# Altium PCB PUMP_MODULE_20230110.PcbDoc (part 2 of 6)
Units mm, origin at the board's own origin, x right, y up, seen from the top; angles counter-clockwise.
Board outline 260.15 x 142.01 mm, 4 copper layers (Top Layer, Mid-Layer 1, Mid-Layer 2, Bottom Layer); 422 components, 240 nets, 1746 pads, 416 vias.
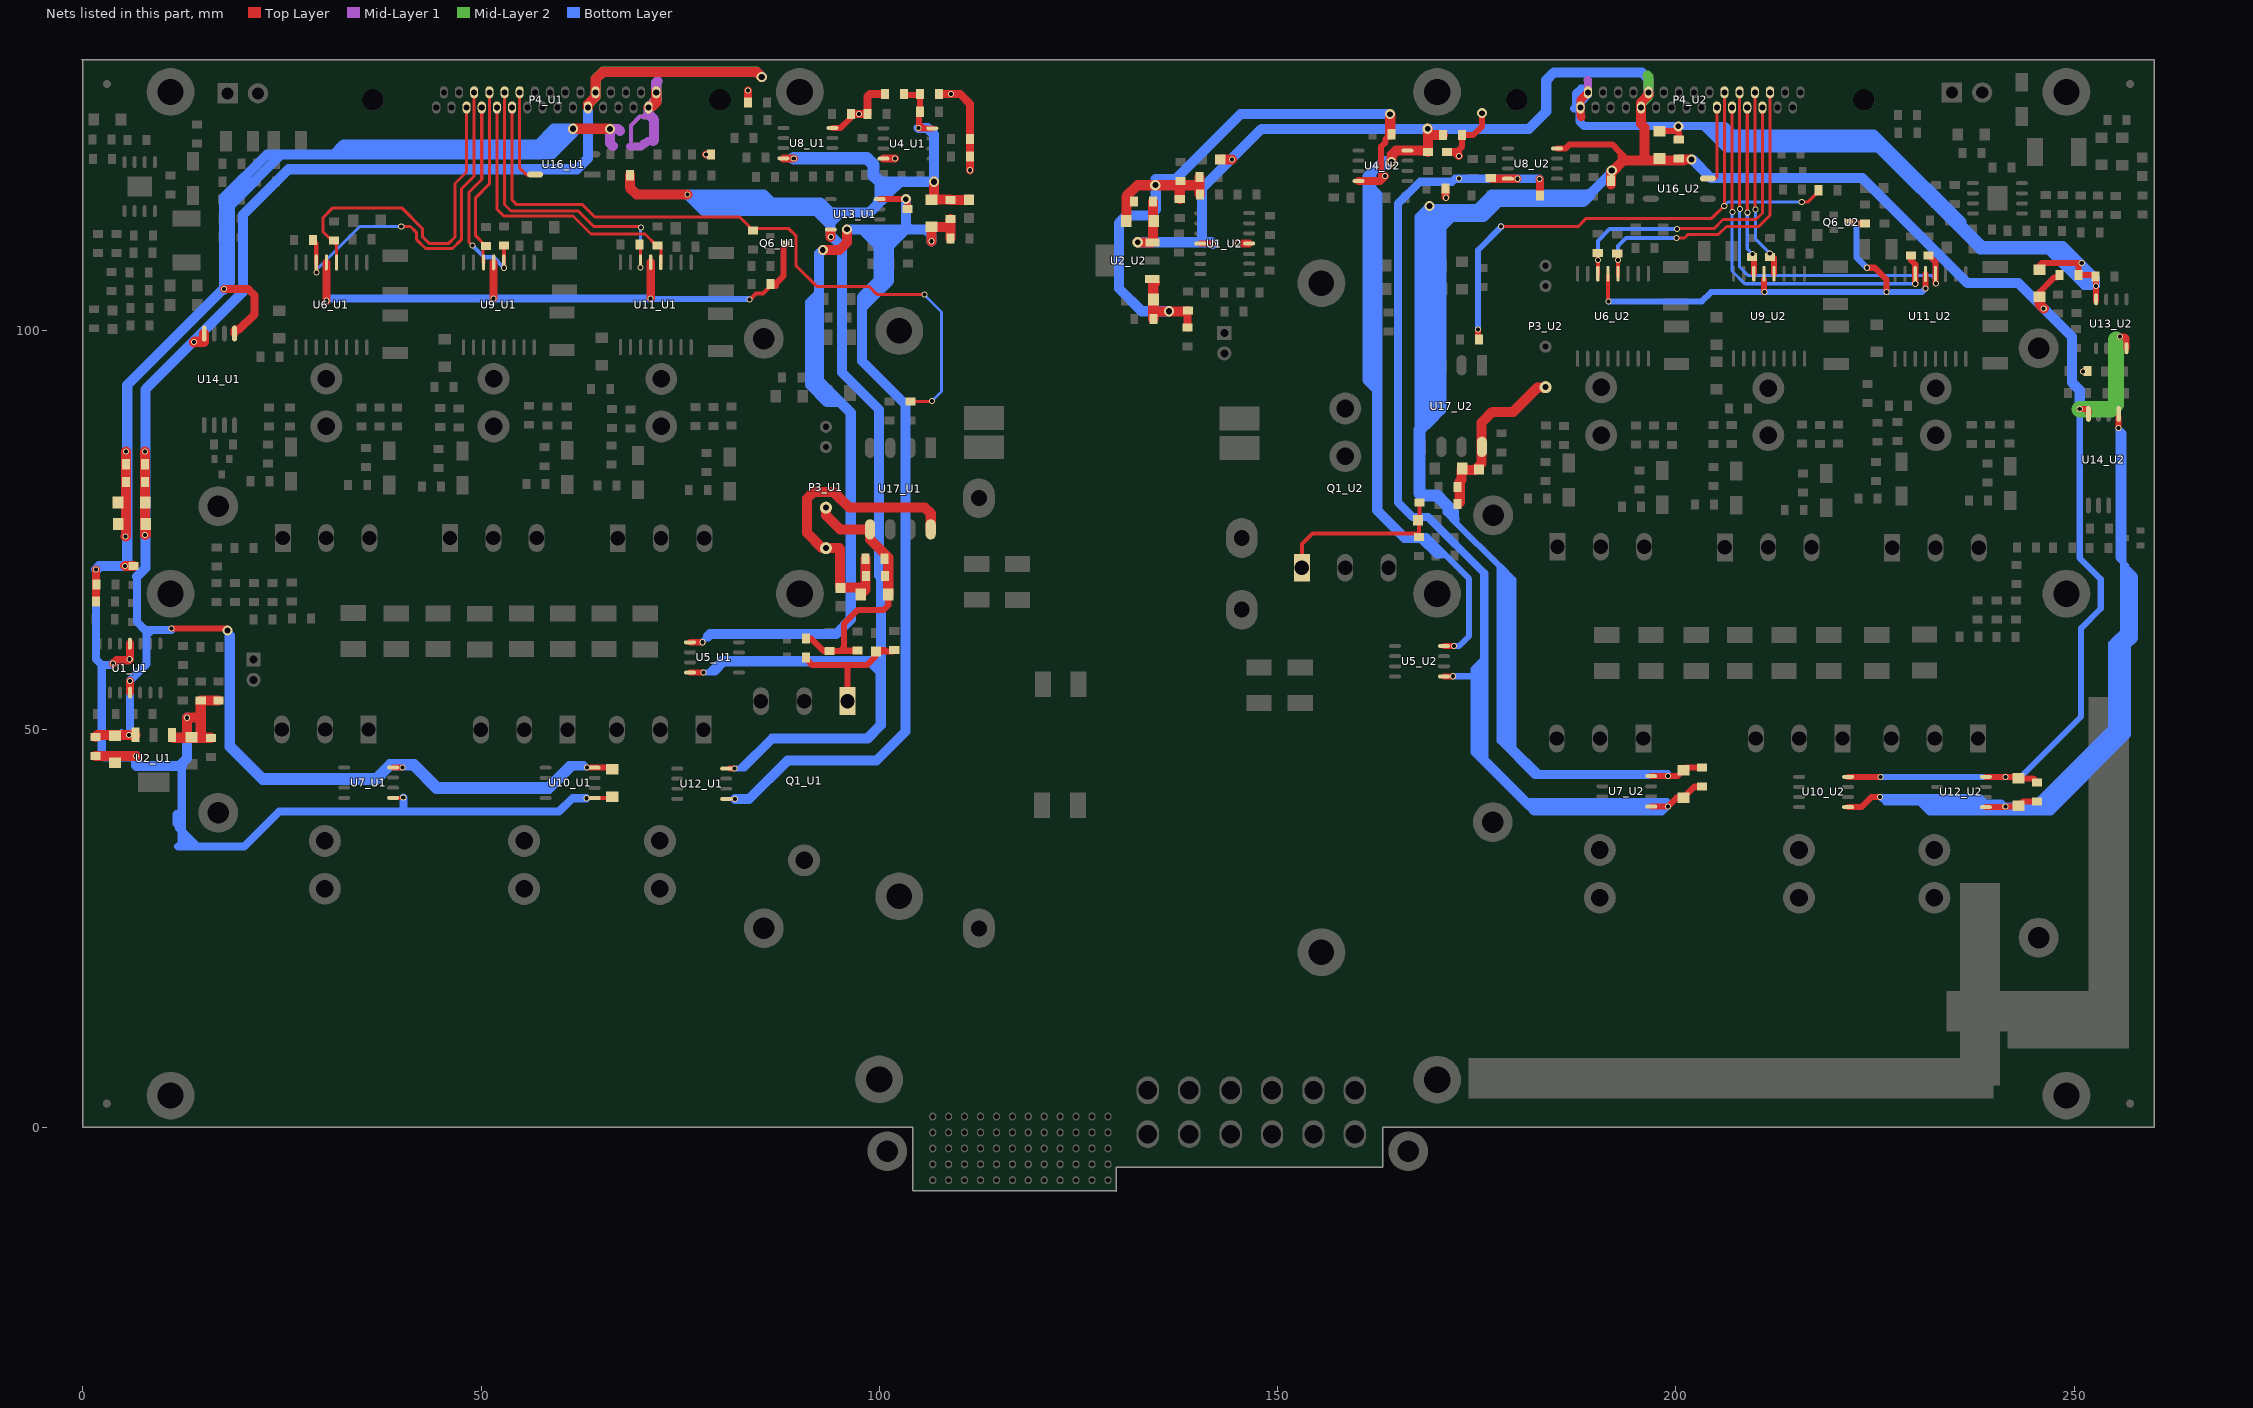
[diagram p4: the nets of this part, all layers, seen from the top]

## Free pads (board coordinates)
  rect 2.54x2.54 on Top Solder: 0(30.302,69.52) 0(51.587,69.596) 0(72.466,69.723) ""(161.417,9.855)
  rect 4.572x5.08 on Bottom Solder: 1(153.619,63.475) 1(190.221,54.534) 11(30.734,60.63) 11(30.759,55.448)
  rect 5.08x10.16 on Bottom Solder: 1(191.745,60.528) 1(195.301,64.186) 6(204.14,24.384) 6(204.14,33.35) 6(204.14,43.104) 7(243.713,85.573) 7(243.713,87.63)
  rect 5.08x8.89 on Bottom Solder: 1(224.714,58.268) 1(224.714,63.627) 1(234.315,58.42) 1(234.315,61.316) 1(236.957,63.957)
  rect 5.08x11.43 on Bottom Solder: 2(203.733,60.604) 2(204.14,53.467) 2(204.14,60.604) 2(213.411,60.274) 2(216.306,63.602)
  rect 5.08x3.81 on Bottom Solder: 3(232.664,54.077) 12(83.642,36.754) 12(91.999,40.869) 12(93.396,40.869) 12(98.273,40.869)
  rect 2.54x2.032 on Bottom Solder rot 135: 4(41.478,80.239) 4(41.656,80.797) 4(62.459,81.382) 4(201.016,79.832) 4(222.301,78.892) 4(224.231,68.224)
  rect 5.08x2.54 on Bottom Solder rot 45: 4(42.088,33.071)
  rect 5.08x3.81 on Bottom Solder rot 45: 4(191.11,57.455) 4(191.643,55.55) 4(192.329,66.091) 4(194.716,58.623) 4(214.071,66.091)
  rect 2.54x3.81 on Bottom Solder rot 135: 4(201.371,36.601) 4(216.56,54.254)
  rect 2.54x3.81 on Bottom Solder rot 45: 4(203.632,66.726) 4(213.106,54.153) 4(214.935,54.559) 4(224.765,54.534)
  rect 4.572x2.54 on Bottom Solder: 4(215.494,53.061) 11(75.082,68.275) 11(76.708,69.825)
  rect 2.54x3.81 on Bottom Solder: 4(216.51,56.007) 4(217.576,56.236)
  rect 2.54x2.54 on Bottom Solder rot 45: 4(222.453,85.7)
  rect 2.54x2.032 on Bottom Solder rot 45: 4(231.775,56.159) 4(234.264,64.059) 4(235.229,53.823) 4(235.509,68.047) 4(236.906,55.499) 4(237.871,59.334)
  rect 3.81x2.032 on Bottom Solder rot 45: 4(233.858,66.396)
  rect 3.81x2.032 on Bottom Solder: 4(237.592,68.656)
  rect 3.81x10.16 on Bottom Solder: 7(19.863,24.917) 7(70.891,61.341)
  rect 2.54x10.16 on Bottom Solder: 7(41.123,85.496) 7(41.123,94.386) 7(42.012,65.405) 7(42.012,75.54) 7(61.849,85.928) 7(61.849,94.437) 7(221.945,84.15) 7(221.945,89.789) 7(221.945,93.878) ""(163.728,8.204) ""(164.846,8.179)
  rect 2.032x8.89 on Bottom Solder: 7(41.758,53.213) 7(41.758,56.947) 7(42.266,53.061) 7(42.266,56.947) 7(44.247,53.162) 7(44.247,56.947) 7(44.247,65.202) 7(64.465,59.512) 7(64.745,64.719)
  rect 2.032x10.16 on Bottom Solder: 7(63.144,66.015) 7(63.144,76.175) 7(63.246,60.147) 7(202.184,65.913) 7(202.184,75.971) 7(223.19,72.771) 7(223.19,80.62) 7(226.238,57.379) 7(243.967,65.71)
  rect 3.302x10.16 on Bottom Solder: 7(200.914,85.014) 7(200.914,89.764) 7(200.914,93.751) 7(244.602,75.413)
  rect 3.302x7.62 on Bottom Solder: 7(236.855,59.461) 7(244.602,58.674)
  rect 4.572x10.16 on Bottom Solder: 10(30.251,58.014) 10(30.251,62.941) 10(34.595,65.888) 10(34.646,61.798) 10(52.299,61.468) 10(55.829,58.166) 10(55.829,65.837)
  rect 4.572x5.08 on Bottom Solder rot 135: 11(32.283,67.361) 11(33.198,56.667) 11(53.492,66.548)
  rect 4.572x5.08 on Bottom Solder rot 45: 11(53.442,56.515)
  rect 4.572x2.54 on Bottom Solder rot 45: 11(73.508,64.872) 11(76.479,67.843)
  rect 3x4.572 on Bottom Solder: 12(70.485,55.448)
  rect 4.572x4.572 on Bottom Solder rot 135: 12(72.796,66.243) 12(74.447,67.894)
  rect 3.81x5.08 on Bottom Solder: 12(83.007,33.35)
  rect 3.302x6.35 on Bottom Solder rot 135: 12(84.607,35.585) 12(87.274,38.252) 12(88.367,39.345)
  rect 4.572x7.112 on Bottom Solder: 12(91.897,21.971)
  rect 4.572x7.112 on Bottom Solder rot 135: 12(92.227,21.184) 12(93.802,26.391)
  rect 12.192x4.572 on Bottom Solder: 12(94.132,39.04)
  rect 4.572x7.112 on Bottom Solder rot 45: 12(95.225,37.211)
  rect 4.572x2 on Bottom Solder: 13(72.263,54.153)
  rect 4.572x2.54 on Bottom Solder rot 135: 14(71.933,55.855)
  round 1.016 smd: ""(3.025,3) ""(3.025,131) ""(257.025,3) ""(257.025,131)
  round 1.016 smd far side: ""(3.025,3) ""(3.025,131) ""(257.025,3) ""(257.025,131)
  round 6 hole 3.3: ""(11.025,4) ""(11.025,67) ""(11.025,130) ""(90.025,67) ""(90.025,130) ""(99.975,6.025) ""(170.025,6) ""(170.025,67) ""(170.025,130) ""(249.025,4) ""(249.025,67) ""(249.025,130)
  round 5 hole 2.7: ""(17,39.5) ""(17,78) ""(85.5,25) ""(85.5,99) ""(177.016,38.335) ""(177.041,76.83) ""(245.541,23.83) ""(245.541,97.83)
  rect 4.064x21.59 on Top Solder: ""(19.38,13.056) ""(19.38,23.495) ""(22.504,13.005) ""(22.555,31.115) ""(22.606,35.89) ""(37.008,26.111)
  rect 1.27x3.048 on Top Solder rot 135: ""(20.244,34.773) ""(188.798,68.174) ""(208.128,52.324) ""(209.956,68.174) ""(211.861,53.289) ""(228.981,53.238) ""(230.734,68.021) ""(234.848,55.118)
  rect 2.032x3.048 on Top Solder: ""(21.59,48.006) ""(21.59,50.495) ""(155.524,65.126)
  rect 2x3.81 on Top Solder: ""(22.25,49.53) ""(81.788,53.619)
  rect 2.032x3.5 on Top Solder rot 45: ""(22.682,47.193)
  rect 5.08x10.16 on Bottom Solder rot 45: ""(23.419,18.313) ""(47.295,19.101)
  rect 1.524x4.572 on Top Solder rot 135: ""(23.698,52.73)
  rect 3.048x2.032 on Top Solder: ""(26.314,53.873) ""(41.859,53.365) ""(47.549,53.289) ""(155.016,60.604) ""(185.395,52.172) ""(202.362,52.756) ""(203.378,51.714) ""(204.419,52.756) ""(205.969,51.714) ""(207.442,52.756)
  rect 2.032x3.81 on Top Solder rot 135: ""(27.33,55.524) ""(46.99,51.664) ""(48.666,53.34) ""(52.934,55.753) ""(68.58,54.889)
  rect 2.032x3.048 on Top Solder rot 135: ""(28.194,54.661) ""(49.936,69.063) ""(70.841,69.215) ""(100.838,49.581) ""(116.484,75.311) ""(149.301,61.824) ""(154.381,64.795) ""(186.411,53.34) ""(187.223,53.01)
  rect 3.048x3.81 on Top Solder: ""(29.642,41.224) ""(29.667,45.466) ""(54.788,41.046) ""(54.813,45.161) ""(71.476,41.123) ""(71.476,45.441) ""(138.43,10.82)
  rect 1.27x3.048 on Top Solder rot 45: ""(30.277,40.97) ""(33.858,38.684) ""(35.23,38.329) ""(55.575,40.792) ""(58.801,38.659) ""(60.147,38.532) ""(72.314,40.742) ""(75.971,38.583) ""(77.064,38.481) ""(192.43,68.25) ""(201.219,52.222) ""(208.102,53.264) ""(213.157,68.301) ""(225.171,53.264) ""(233.909,68.097)
  round 4 hole 2.2: ""(30.399,35.962) ""(30.585,88) ""(51.566,88) ""(55.393,35.962) ""(72.462,35.962) ""(72.623,88) ""(158.5,84.256) ""(190.456,34.83) ""(190.606,86.898) ""(211.612,86.898) ""(215.456,34.83) ""(232.456,34.83) ""(232.618,86.898)
  rect 10.16x3.81 on Top Solder: ""(30.759,55.601) ""(37.897,55.601) ""(47.219,55.601)
  rect 2.032x3.048 on Top Solder rot 45: ""(31.852,68.986) ""(53.213,69.063) ""(74.092,69.215) ""(79.451,63.805) ""(100.584,43.79)
  rect 3.048x1.016 on Top Solder: ""(32.385,39.827) ""(33.909,39.827) ""(57.683,39.649) ""(59.182,39.649) ""(73.863,39.726) ""(76.53,39.726)
  rect 3.048x5.08 on Top Solder rot 45: ""(36.195,37.592)
  rect 3.81x6.35 on Top Solder rot 45: ""(38.557,14.453)
  rect 5.08x10.16 on Bottom Solder rot 135: ""(39.294,19.406) ""(99.543,37.059) ""(106.451,44.348) ""(116.789,73.406)
  rect 2.032x3.81 on Top Solder rot 45: ""(40.513,53.467) ""(42.316,51.689) ""(64.262,54.889)
  rect 5.08x15.24 on Bottom Solder: ""(41.758,25.527) ""(95.377,17.882) ""(201.625,28.55)
  rect 50.8x10.16 on Bottom Solder: ""(43.358,15.342) ""(67.894,15.342)
  rect 5.08x25.4 on Bottom Solder: ""(44.298,23.139)
  rect 38.1x3.048 on Top Solder: ""(44.729,56.464) ""(53.975,56.464)
  rect 3.81x20.32 on Top Solder: ""(44.806,30.378) ""(44.806,47.295)
  rect 66.04x5.08 on Bottom Solder: ""(50.902,5.156) ""(207.137,5.969)
  rect 55.88x3.048 on Top Solder: ""(56.972,68.072)
  rect 65.04x5.08 on Bottom Solder: ""(57.81,5.232)
  rect 39.37x3.81 on Top Solder: ""(59.131,12.446) ""(85.192,18.898) ""(96.596,12.446) ""(109.626,12.446) ""(112.37,18.898)
  rect 3.048x4.064 on Top Solder rot 45: ""(61.011,37.694)
  rect 4.064x13.97 on Top Solder: ""(61.29,30.48)
  rect 3.81x8.89 on Top Solder rot 45: ""(63.779,21.717)
  rect 3.81x12 on Top Solder rot 45: ""(65.659,23.647)
  rect 3.048x2.286 on Top Solder: ""(66.421,53.975)
  rect 2.032x2.54 on Top Solder: ""(77.47,36.779)
  rect 2.54x3.81 on Top Solder: ""(77.724,36.5)
  rect 3.048x3.81 on Top Solder rot 45: ""(78.334,37.821)
  rect 11.43x3.048 on Top Solder: ""(79.019,65.202) ""(79.451,65.202) ""(84.099,38.024) ""(94.132,38.024) ""(102.057,38.024)
  rect 10.16x3.048 on Top Solder: ""(79.985,65.202)
  rect 8.89x3.048 on Top Solder: ""(81.636,36.093)
  rect 5.588x7.62 on Top Solder: ""(82.601,65.811)
  rect 3.048x3.81 on Top Solder rot 135: ""(86.36,37.008)
  rect 3.302x3.81 on Top Solder rot 45: ""(95.123,36.627) ""(118.542,30.15)
  rect 3.81x15.24 on Bottom Solder: ""(95.885,30.785) ""(96.012,27.737)
  rect 15.24x5.08 on Top Solder: ""(96.774,46.711) ""(169.469,50.749) ""(242.875,55.474) ""(249.377,55.499)
  rect 11.43x3.81 on Top Solder: ""(101.016,36.017)
  rect 7.62x12.7 on Top Solder rot 135: ""(107.772,52.553)
  rect 15.24x7.62 on Bottom Solder: ""(108.001,38.964) ""(143.281,57.633)
  rect 15.24x8.89 on Top Solder: ""(108.179,46.126) ""(109.982,46.126)
  rect 4.064x8.89 on Top Solder rot 45: ""(108.712,34.95) ""(126.314,73.228) ""(140.233,51.765) ""(152.806,44.12)
  rect 8.89x40.64 on Bottom Solder: ""(111.125,55.448)
  rect 8.89x20.32 on Top Solder: ""(113.182,53.289)
  rect 10.668x2.032 on Top Solder: ""(116.078,74.041) ""(124.816,74.092) ""(149.504,60.604)
  rect 19.05x4.572 on Top Solder: ""(119.939,32.639) ""(127.762,26.289) ""(127.762,28.372) ""(133.858,26.213) ""(133.858,30.505)
  rect 15.24x15.24 on Bottom Solder: ""(121.107,13.233)
  rect 2.032x3.81 on Bottom Solder rot 45: ""(124.257,5.385) ""(128.27,4.293) ""(129.337,3.226) ""(131.648,0.914) ""(230.327,11.836) ""(251.384,29.185) ""(256.413,19.888)
  rect 7.62x15.24 on Bottom Solder rot 135: ""(124.612,22.885) ""(139.802,43.688) ""(149.479,57.937)
  rect 2.032x3.81 on Bottom Solder: ""(125.705,5.029) ""(127.711,5.029)
  rect 22.86x8.89 on Top Solder: ""(127.61,78.537)
  rect 20.32x7.62 on Bottom Solder: ""(128.219,74.905) ""(128.245,78.715) ""(132.105,74.574) ""(132.105,78.715) ""(163.576,31.115)
  rect 2.54x10.16 on Bottom Solder rot 135: ""(129.769,11.024) ""(149.479,50.241) ""(155.702,62.814) ""(168.097,10.846) ""(241.884,9.042)
  rect 3.048x5 on Top Solder rot 45: ""(129.972,11.506)
  rect 2.54x1.27 on Top Solder: ""(131.877,9.296) ""(132.817,9.296) ""(190.602,68.377) ""(190.602,69.24) ""(209.956,52.375) ""(211.607,68.377) ""(211.633,69.418) ""(227.076,52.349) ""(232.613,69.037) ""(232.639,68.123)
  rect 1.27x2.54 on Top Solder rot 45: ""(132.359,10.363)
  rect 11.43x43.18 on Top Solder: ""(133.299,60.452)
  rect 15.24x50.8 on Bottom Solder: ""(133.756,36.017)
  rect 3.048x11.43 on Top Solder rot 45: ""(134.772,15.621)
  rect 4.572x22.86 on Top Solder rot 45: ""(135.458,25.248)
  rect 20.32x15.24 on Bottom Solder: ""(138.1,53.848)
  rect 3.032x5.048 on Top Solder rot 135: ""(139.573,77.267)
  rect 3.81x8.382 on Top Solder rot 45: ""(140.741,24.155)
  rect 3.81x6.35 on Top Solder: ""(141.478,23.114) ""(161.569,54.966)
  rect 20.32x8.89 on Top Solder: ""(141.681,45.999)
  rect 20.32x3.81 on Top Solder: ""(142.062,40.716) ""(162.128,40.716)
  rect 9.652x5.08 on Top Solder: ""(143.256,80.442)
  rect 3.048x10.16 on Top Solder: ""(143.535,13.818) ""(143.535,17.577)
  rect 15.32x7.62 on Bottom Solder: ""(147.93,54.508)
  rect 3.81x19.05 on Top Solder: ""(149.377,18.11)
  rect 3.81x8.382 on Top Solder rot 135: ""(151.841,28.88)
  rect 7.62x5.08 on Top Solder: ""(152.73,62.967)
  rect 2.54x5.08 on Top Solder: ""(154.889,11.151)
  rect 2.54x5.08 on Bottom Solder: ""(156.286,63.17)
  rect 7.62x15.32 on Bottom Solder: ""(157.607,58.369)
  rect 1x1 on Top Solder: ""(158.979,9.093) ""(159.69,9.093) ""(161.214,11.278) ""(167.081,9.119)
  rect 3.302x13.462 on Top Solder rot 135: ""(159.614,16.662) ""(161.874,18.898)
  rect 1.27x2 on Top Solder rot 135: ""(159.639,9.804) ""(160.35,9.754) ""(160.452,10.617) ""(167.843,9.779) ""(168.377,10.363)
  rect 2.54x10.16 on Bottom Solder rot 45: ""(160.833,26.391)
  rect 1.27x2.54 on Bottom Solder rot 135: ""(161.011,1.372)
  rect 2.032x2.032 on Top Solder rot 135: ""(161.087,64.033) ""(163.043,62.306)
  rect 2.54x1.27 on Bottom Solder: ""(161.112,-2.007)
  rect 1.27x2.54 on Bottom Solder: ""(161.112,0.432) ""(161.163,-0.33) ""(162.154,-1.372) ""(162.154,0.279) ""(162.154,1.473)
  rect 3.81x5.08 on Top Solder: ""(161.544,61.493)
  rect 3.81x3.81 on Top Solder rot 45: ""(162.382,51.791)
  rect 1.016x2.54 on Bottom Solder rot 45: ""(162.433,9.525) ""(240.386,19.634)
  rect 1.016x2.54 on Bottom Solder rot 135: ""(162.611,3.15)
  rect 5.08x3.81 on Top Solder: ""(162.916,64.008)
  rect 3.302x10.16 on Top Solder rot 135: ""(165.1,13.36) ""(225.908,14.783) ""(231.546,20.396) ""(234.671,23.52)
  rect 10.16x5.08 on Bottom Solder: ""(166.141,12.319)
  rect 12.7x20.32 on Bottom Solder: ""(167.437,22.504)
  rect 27.94x3.81 on Top Solder: ""(167.437,31.293)
  rect 2.032x3.81 on Bottom Solder rot 135: ""(171.704,11.811) ""(229.464,7.645) ""(251.765,19.634)
  rect 7.62x15.24 on Bottom Solder rot 45: ""(174.346,23.851)
  rect 5.08x7.62 on Top Solder rot 135: ""(176.301,53.645) ""(181.28,62.687) ""(181.61,58.953) ""(185.953,63.322)
  rect 3.81x7.62 on Top Solder: ""(178.105,59.284) ""(178.105,63.119)
  rect 35.56x3.81 on Top Solder: ""(181.762,23.901) ""(189.433,23.851)
  rect 4.572x6.35 on Top Solder rot 135: ""(182.016,33.274)
  rect 3.81x5.588 on Top Solder: ""(183.972,36.678) ""(183.972,36.678)
  rect 2.54x3.048 on Top Solder rot 135: ""(184.048,39.649)
  rect 3.81x5.588 on Top Solder rot 135: ""(185.344,38.456) ""(205.969,38.557)
  rect 38.1x3.81 on Top Solder: ""(186.588,16.205)
  rect 5.588x3.81 on Top Solder: ""(186.588,40.081)
  rect 25.4x5.08 smd: ""(186.665,6.172) ""(210.414,6.172) ""(227.203,6.172)
  rect 2.54x3.048 on Top Solder: ""(188.112,44.018)
  rect 33.02x3.81 on Top Solder: ""(192.71,66.015) ""(218.999,66.04)
  rect 50.1x1.524 on Top Solder: ""(193.675,10.77) ""(198.222,10.77)
  rect 4.572x10.16 on Top Solder rot 135: ""(201.524,27.203)
  rect 4.572x7.16 on Top Solder rot 135: ""(203.022,26.213)
  rect 33.02x2.54 on Top Solder: ""(203.276,53.873) ""(210.49,53.873)
  rect 4.572x10.16 on Top Solder: ""(204.927,30.709) ""(204.927,33.071)
  rect 66.04x10.16 on Bottom Solder: ""(205.257,16.789)
  rect 3.81x7.62 on Top Solder rot 135: ""(206.781,37.135)
  rect 12.7x3.81 on Top Solder: ""(208.686,16.205)
  rect 7.62x3.81 on Top Solder: ""(210.312,39.954)
  rect 3.556x2.54 on Top Solder: ""(212.293,43.663) ""(229.667,43.663) ""(229.743,39.98) ""(232.461,19.279)
  rect 4.572x12.7 on Top Solder rot 135: ""(217.907,20.599) ""(222.58,25.273)
  rect 2x5 on Top Solder rot 135: ""(222.783,12.548)
  rect 5.08x8.89 on Top Solder: ""(226.162,32.106)
  rect 3.556x7.112 on Top Solder rot 135: ""(227.381,37.44) ""(233.68,9.347) ""(237.617,24.13) ""(241.452,29.159) ""(242.799,9.246) ""(250.876,16.231) ""(251.308,35.128)
  rect 10.16x15.24 on Bottom Solder: ""(235.102,14.199)
  rect 3.556x7.112 on Top Solder: ""(235.661,19.38)
  rect 5.08x25.4 smd: ""(238.176,17.958) ""(254.356,24.765) ""(254.356,41.326)
  rect 3.556x5 on Top Solder rot 135: ""(238.531,31.217)
  rect 5.08x30.48 on Top Solder: ""(239.243,18.771)
  rect 3.556x7.112 on Top Solder rot 45: ""(240.335,18.491) ""(250.977,29.362) ""(251.231,53.035)
  rect 30.48x2.54 on Top Solder: ""(241.757,53.873)
  rect 15.24x10.16 on Bottom Solder: ""(242.468,14.224) ""(251.054,14.275)
  rect 20.32x5.08 smd: ""(244.145,14.58)
  rect 20.32x5.08 on Top Solder: ""(246.863,32.106)
  rect 15.24x5.08 smd: ""(249.276,12.446)
  rect 15.24x5.08 on Bottom Solder: ""(249.276,32.106)
  rect 5.08x20.32 on Bottom Solder: ""(254.33,24.435)

## Via types
v1: diameter 0.762, hole 0.508, Top Layer to Bottom Layer, 208 vias
v2: diameter 2.032, hole 1.27, Top Layer to Bottom Layer, 78 vias
v3: diameter 1.27, hole 0.762, Top Layer to Bottom Layer, 61 vias
v4: diameter 1.524, hole 1.016, Top Layer to Bottom Layer, 53 vias
v5: diameter 1.27, hole 0.711, Top Layer to Bottom Layer, 16 vias

## Nets (pads, with @x,y where several pads share a name; then routed paths per layer and width w, separated by ;. In a path a pad name is that pad's centre, name@x,y a point inside that pad or via, vN(x,y) a via of type N, cw(c..) or ccw(c..) an arc to the next point about the centre after c; other vN are vias at no path point)
1PWM1_U1: P4_U1.3 R31_U1.1 U6_U1.12 | length 42.6
  Top Layer w0.381: U6_U1.12@31.877,109.017 31.877,110.719 30.175,112.42 30.175,114.224 31.394,115.443 40.03,115.443 42.621,112.852 42.621,111.836 43.459,110.998 45.949,110.998 46.736,111.785 46.736,118.491 48.184,119.939 P4_U1.3@48.184,128.047
1PWM1_U2: P4_U2.3 R31_U2.1 U6_U2.12 | length 40.4
  Top Layer w0.381: v1(200.076,111.658) 201.092,111.658 201.549,112.116 205.359,112.116 206.35,113.106 210.416,113.106 211.813,114.503 P4_U2.3@211.813,129.952
  Top Layer w0.508: U6_U2.12@192.735,106.967 U6_U2.12@192.735,107.17 v1(192.735,108.915) R31_U2.1@192.735,109.525
  Bottom Layer w0.508: v1(192.735,108.915) 192.735,110.642 193.751,111.658 v1(200.076,111.658)
1PWM2_U1: P4_U1.18 R33_U1.1 U6_U1.14 | length 46.8
  Top Layer w0.381: v1(39.98,113.106) 41.142,113.106 41.745,112.503 41.745,112.484 41.91,112.319 41.91,111.455 43.028,110.338 46.406,110.338 47.523,111.455 47.523,117.818 49.137,119.431 P4_U1.18@49.136,129.952
  Top Layer w0.508: R33_U1.1@28.931,111.404 29.312,111.023 U6_U1.14@29.312,108.592 ; v1@29.337,107.34 U6_U1.14@29.337,109.118
  Bottom Layer w0.381: v1(29.362,107.34) 29.362,107.696 34.773,113.106 v1(39.98,113.106)
1PWM2_U2: P4_U2.18 R33_U2.1 U6_U2.14 | length 40.6
  Top Layer w0.381: v1(200.152,112.776) 200.203,112.827 204.775,112.827 205.918,113.97 210.033,113.97 210.861,114.798 P4_U2.18@210.861,128.047
  Top Layer w0.508: U6_U2.14@190.195,106.967 U6_U2.14@190.195,107.17 v1(190.195,108.89) R33_U2.1@190.195,109.804
  Bottom Layer w0.508: v1(190.195,108.89) 190.195,111.277 191.694,112.776 v1(200.152,112.776)
1PWM3_U1: P4_U1.4 R48_U1.1 U9_U1.12 | length 26.7
  Top Layer w0.381: v1(48.92,110.693) 48.514,111.1 48.514,117.424 50.089,118.999 ; 50.089,119.675 50.089,118.999 ; P4_U1.4@50.089,128.047 50.089,118.999
  Top Layer w0.508: v1(52.857,107.925) R48_U1.1@52.857,110.642
  Bottom Layer w0.508: v1(48.92,110.693) 50.368,109.245 51.537,109.245 v1(52.857,107.925)
1PWM3_U2: P4_U2.4 R48_U2.1 U9_U2.12 | length 23
  Top Layer w0.381: v1@209.908,115.24 209.908,127.398 ; 209.908,127.398 209.908,128.696 P4_U2.4@209.908,129.952
  Top Layer w0.762: U9_U2.12@212.319,107.17 U9_U2.12@212.319,107.442 ; U9_U2.12@212.319,107.373 R48_U2.1@212.319,109.118
  Bottom Layer w0.381: v1(209.982,115.24) 210.007,115.214 210.007,111.506 v1(211.785,109.728)
1PWM4_U1: P4_U1.19 R50_U1.1 U9_U1.14 | length 24.1
  Top Layer w0.381: U9_U1.14@50.267,109.169 50.267,110.287 R50_U1.1@50.622,110.642 49.276,111.989 49.276,116.662 51.042,118.428 ; 51.042,119.736 51.042,118.428 ; P4_U1.19@51.041,129.952 51.042,118.428
  Top Layer w0.508: U9_U1.14@50.317,108.592 U9_U1.14@50.317,109.118
1PWM4_U2: P4_U2.19 R50_U2.1 U9_U2.14 | length 20.4
  Top Layer w0.381: v1@208.956,114.833 P4_U2.19@208.956,128.047
  Top Layer w0.762: U9_U2.14@209.779,107.17 R50_U2.1@209.779,108.941
  Bottom Layer w0.381: v1@208.956,114.833 208.956,110.297 v1(209.601,109.652)
  other v1: 208.966,114.833
1PWM5_U1: P4_U1.5 R63_U1.1 U11_U1.12 | length 37.4
  Top Layer w0.381: P4_U1.5@51.994,128.047 51.994,115.265 52.832,114.427 61.544,114.427 63.805,112.166 70.587,112.166 71.94,110.813 72.568,110.813 U11_U1.12@72.568,108.618
1PWM5_U2: P4_U2.5 R63_U2.1 U11_U2.12 | length 51.6
  Top Layer w0.381: v1@208.003,115.316 P4_U2.5@208.003,129.952
  Top Layer w0.762: R63_U2.1@231.724,109.499 232.588,108.636 U11_U2.12@232.588,107.145 v1@232.588,105.969
  Bottom Layer w0.381: v1@208.003,115.316 208.003,108.023 209.093,106.934 232.131,106.934 232.639,106.426 v1(232.639,105.969)
  other v1: 208.026,115.316
1PWM6_U1: P4_U1.20 R65_U1.1 U11_U1.14 | length 40.7
  Top Layer w0.381: P4_U1.20@52.946,129.952 52.947,115.862 53.746,115.062 62.205,115.062 64.186,113.081 69.875,113.081 v1@70.053,112.903 ; v1(70.028,107.95) R65_U1.1@70.028,111.118
  Bottom Layer w0.381: v1@70.028,107.798 v1@70.028,112.903
  other v1: 70.053,113.005
1PWM6_U2: P4_U2.20 R65_U2.1 U11_U2.14 | length 48.1
  Top Layer w0.381: v1@207.051,114.91 P4_U2.20@207.051,128.047
  Top Layer w0.762: R65_U2.1@229.514,109.55 229.514,108.864 230.048,108.331 U11_U2.14@230.048,107.391 ; v1(230.048,105.918) U11_U2.14@230.048,107.145 U11_U2.14@230.048,107.391 ; U11_U2.14@230.073,107.417 U11_U2.14@230.048,107.391
  Bottom Layer w0.381: v1@207.051,114.91 207.051,107.528 208.661,105.918 v1(230.048,105.918)
  other v1: 207.086,114.91
+5VA_U1: C1_U1.1 C4_U1.1 C55_U1.1 C56_U1.1 C57_U1.1 C58_U1.2 C59_U1.2 C60_U1.2 C62_U1.1 C63_U1.1 C65_U1.1 D19_U1.1 P4_U1.11 P4_U1.26 R13_U1.2 R85_U1.1 U1_U1.4 U2_U1.3 U4_U1.8 U5_U1.8 U7_U1.8 U8_U1.8 U10_U1.8 U12_U1.8 U13_U1.8 U14_U1.8 | length 640.1
  Top Layer w0.762: v1(11.151,62.662) v3@18.186,62.662 ; U7_U1.8@38.964,45.187 v1(40.157,45.187) ; v1(63.297,45.161) U10_U1.8@64.262,45.161 66.269,45.161 C55_U1.1@66.472,44.958 ; U5_U1.8@76.225,57.099 v1(77.927,57.099) ; U12_U1.8@81.28,45.085 v1(81.839,45.085) ; C60_U1.2@103.099,129.616 104.978,129.616 C58_U1.2@105.08,129.718 105.105,129.692 R13_U1.2@105.105,127.508 ; R13_U1.2@104.953,127.533 104.953,126.035 ; U4_U1.8@106.655,125.425 105.562,125.425 ; 104.953,126.035 105.562,125.425 ; 104.953,126.035 104.953,125.501 v1(104.902,125.451) 104.927,125.425 105.562,125.425
  Top Layer w1.016: v1(5.918,56.032) 5.944,56.007 U1_U1.4@5.944,54.585 ; U8_U1.8@87.96,121.666 v1(89.256,121.666)
  Top Layer w1.27: C4_U1.1@1.575,48.997 1.829,49.251 U2_U1.3@6.629,49.251 ; v1(7.798,84.836) 7.823,84.811 C63_U1.1@7.823,81.026 v1(7.823,74.371) 7.899,74.447 C56_U1.1@7.899,75.768 ; v1(13.97,98.577) 14.021,98.628 15.189,98.628 15.24,98.679 U14_U1.8@15.24,99.67 ; P4_U1.11@63.424,128.047 63.424,128.448 64.376,129.4 P4_U1.26@64.376,129.952 64.376,131.584 65.278,132.486 84.633,132.486 v3(85.242,131.877) ; R85_U1.1@68.682,119.532 68.682,117.983 69.545,117.119 v1(75.895,117.119) ; v1@93.853,111.785 93.853,112.293 ; 93.853,112.344 93.853,112.293 ; 93.878,112.319 93.853,112.293 ; v3(106.883,118.72) 106.883,116.815 C65_U1.1@106.553,116.484 108.864,116.484 C59_U1.2@108.915,116.434 111.252,116.434 D19_U1.1@111.277,116.459
  Mid-Layer 2 w1.27: P4_U1.11@63.424,128.047 63.424,128.397 64.376,129.349 P4_U1.26@64.376,129.952 64.414,129.99 64.414,131.674 65.303,132.563 84.557,132.563 v3(85.242,131.877)
  Bottom Layer w0.762: v1(77.927,57.099) 78.511,57.099 ; v1(81.839,45.085) 82.474,45.085 ; 78.511,57.099 79.4,57.099 80.543,58.242 98.704,58.242 ; 78.511,57.099 80.188,58.776 99.949,58.776 ; 82.474,45.085 83.083,45.085 86.563,48.565 98.628,48.565 100.457,50.394 100.457,58.42 ; 82.474,45.085 86.462,49.073 98.374,49.073 99.898,50.597 99.898,57.048 ; 98.704,58.242 99.949,58.242 ; 98.704,58.242 99.898,57.048 ; 99.898,57.048 99.898,57.506 ; 99.898,57.506 99.898,58.191 99.949,58.242 ; 99.898,57.506 99.949,57.556 99.949,58.242 ; 99.949,58.242 100.279,58.242 100.457,58.42 ; 99.949,58.242 99.949,58.776 ; 99.949,58.776 99.949,69.291 100.025,69.367 100.457,69.367 100.457,58.42 ; 99.949,58.776 100.101,58.776 100.457,58.42 ; 18.161,47.701 22.504,43.358 36.906,43.358 38.735,45.187 v1(40.157,45.187) 41.351,45.187 44.272,42.266 58.623,42.266 61.519,45.161 v1(63.297,45.161) 62.89,45.568 62.89,45.618 61.316,45.618 61.29,45.593 61.011,45.593 58.395,42.977 44.602,42.977 41.732,45.847 38.456,45.847 36.728,44.12 22.657,44.12 18.72,48.057 18.72,61.824 v3(18.161,62.382) 18.161,47.701
  Bottom Layer w1.016: 4.851,49.505 5.08,49.276 v1(5.817,49.276) ; v1@5.918,49.505 v1(5.918,56.032) 5.918,56.109 8.001,58.191 8.001,61.798 ; 6.807,69.164 6.807,66.811 6.782,66.786 6.782,63.5 7.823,62.459 ; v1@11.125,62.459 8.687,62.459 ; 7.823,62.459 8.001,62.281 8.001,61.798 ; 7.823,62.459 8.661,62.459 ; 8.001,61.798 8.661,62.459 ; 8.661,62.459 8.674,62.471 8.687,62.459 ; 8.661,62.459 8.687,62.459
  Bottom Layer w1.27: 6.807,69.164 7.874,70.231 7.874,92.659 20.117,104.902 20.117,114.579 25.832,120.294 62.052,120.294 63.424,121.666 P4_U1.11@63.424,128.047 ; 99.949,69.291 99.949,90.119 95.301,94.767 95.301,110.592 93.853,112.039 93.853,113.284 ; 99.974,116.281 99.974,116.078 98.781,114.884 95.199,114.884 ; 100.178,116.281 101.155,117.259 ; 100.178,118.593 100.305,118.72 101.067,118.72 ; v1(104.902,125.451) 106.07,125.451 106.883,124.638 v3(106.883,118.72) 102.616,118.72 ; 76.911,116.103 77.978,115.037 87.579,115.037 ; 76.911,116.103 v1(75.895,117.119) 85.496,117.119 86.512,116.103 ; 76.911,116.103 86.512,116.103 ; 86.512,116.103 92.634,116.103 93.853,114.884 ; 86.512,116.103 87.579,115.037 ; 87.579,115.037 92.1,115.037 93.853,113.284 ; 93.853,113.284 93.853,113.538 ; 93.853,113.538 93.853,114.884 ; 93.853,113.538 95.199,114.884 ; 93.853,114.884 95.199,114.884 ; 101.067,118.72 101.155,118.631 101.155,117.259 ; 101.067,118.72 102.616,118.72 ; 101.155,117.259 102.616,118.72
  Bottom Layer w1.524: v1(89.256,121.666) 98.45,121.666 99.289,120.828 99.289,119.482 100.178,118.593 100.178,116.484 99.974,116.281
  other v1: 93.904,111.785
+5VA_U2: C1_U2.1 C4_U2.1 C55_U2.1 C56_U2.1 C57_U2.1 C58_U2.2 C59_U2.2 C60_U2.2 C62_U2.1 C63_U2.1 C65_U2.1 D19_U2.1 P4_U2.11 P4_U2.26 R13_U2.2 R85_U2.1 U1_U2.4 U2_U2.3 U4_U2.8 U5_U2.8 U7_U2.8 U8_U2.8 U10_U2.8 U12_U2.8 U13_U2.8 U14_U2.8 | length 713.5
  Top Layer w0.762: U1_U2.4@140.284,110.947 141.859,110.947 v1(141.884,110.922) ; U5_U2.8@170.891,60.427 v1(172.136,60.427) ; U8_U2.8@185.064,122.911 186.157,122.911 186.665,123.419 191.999,123.419 193.04,122.377 ; U7_U2.8@196.901,44.094 v1(198.984,44.094) 200.203,44.094 C55_U2.1@200.939,44.831 201.27,45.161 C58_U2.2@203.276,45.161 ; U10_U2.8@221.615,44.018 223.799,44.018 223.825,43.993 v1(225.679,43.993) ; U12_U2.8@238.912,44.018 241.325,44.018 v1@241.376,44.069 ; v1(241.376,44.018) 242.824,44.018 C56_U2.1@243.027,43.815 244.856,43.815 C60_U2.2@245.339,43.332 ; C57_U2.1@245.643,104.267 245.643,104.866 247.483,106.705 247.828,106.705 C59_U2.2@248.133,107.01 ; v1(250.698,90.17) 250.723,90.195 251.739,90.195 251.79,90.145 U14_U2.8@251.79,89.586 ; v1@255.753,99.289 256.388,99.289 256.565,99.111 U13_U2.8@256.565,97.815 ; 193.04,122.377 193.421,121.996 193.421,121.412 193.04,121.793 193.04,122.377
  Top Layer w1.27: v5(132.436,111.125) 132.436,111.074 132.461,111.1 U2_U2.3@134.29,111.1 134.366,111.176 C4_U2.1@134.366,116.23 ; D19_U2.1@142.799,121.514 v1(144.272,121.514) ; v3(164.313,121.183) 164.313,122.047 164.897,122.631 U4_U2.8@166.294,122.631 168.681,122.631 R13_U2.2@168.859,122.453 168.859,124.638 ; v5(168.834,125.374) 168.859,125.349 168.859,124.638 ; C63_U2.1@170.764,124.587 168.91,124.587 168.859,124.638 ; R85_U2.1@191.872,118.415 191.872,119.863 193.421,121.412 196.24,121.412 ; P4_U2.11@196.573,129.952 196.573,129.627 195.621,128.675 P4_U2.26@195.621,128.047 195.621,125.968 196.063,125.527 196.063,121.59 196.24,121.412 ; C62_U2.1@200.457,121.539 201.066,121.539 ; v3(201.981,121.539) 201.066,121.539 ; C57_U2.1@245.643,104.267 245.643,103.353 v1(246.177,102.819) ; 196.24,121.412 200.939,121.412 201.066,121.539
  Mid-Layer 2 w1.27: 195.631,126.416 195.621,126.426 P4_U2.26@195.621,128.047 195.621,128.514 196.573,129.466 P4_U2.11@196.573,129.952 196.573,131.9 196.444,132.029
  Mid-Layer 2 w2.032: v1(250.698,90.17) 254.66,90.17 255.245,90.754 255.245,98.857 255.27,98.882
  Bottom Layer w0.762: 162.179,119.913 162.865,120.599 ; 168.021,74.016 168.046,74.016 168.628,74.016 168.897,74.016 174.041,68.872 174.041,61.697 172.771,60.427 v1(172.136,60.427) ; 171.094,78.257 171.094,78.232 171.094,77.216 172.441,75.87 ; 172.034,76.911 172.441,76.505 172.441,75.87 ; 177.14,71.222 178.435,69.926 ; v1(225.679,43.993) 243.281,43.993 250.876,51.587 250.876,62.687 253.34,65.151 253.34,68.834 250.698,71.476 v1(250.698,90.17) ; 162.865,120.599 163.449,121.183 ; 162.865,120.599 163.728,120.599 v3(164.313,121.183) ; 163.449,121.183 163.093,121.183 163.5,121.59 163.906,121.59 v3(164.313,121.183) ; 163.449,121.183 v3(164.313,121.183) ; 172.441,75.87 177.876,70.434 177.876,48.514 182.296,44.094 v1(198.984,44.094) 198.984,44.45 199.034,44.501 182.778,44.501 179.603,47.676 ; 178.435,69.926 179.146,69.215 ; 178.435,69.926 178.435,48.844 179.146,48.133 ; 179.146,48.133 179.603,47.676 ; 179.146,48.133 179.146,69.215 ; 179.146,69.215 179.603,68.758 179.603,47.676
  Bottom Layer w1.27: v5(132.436,111.125) 140.513,111.125 ; v1(141.884,110.922) 141.681,111.125 140.513,111.125 ; 163.093,121.183 161.773,119.863 ; 167.818,87.579 167.818,114.275 168.834,115.291 170.536,115.291 ; 168.021,74.016 165.938,74.016 162.509,77.445 162.509,92.583 ; 168.046,74.016 170.004,72.058 170.585,72.058 ; 168.628,74.016 168.763,73.881 ; 170.358,115.011 170.637,115.291 175.031,115.291 176.86,117.119 189.154,117.119 v3@192.049,120.015 ; P4_U2.11@196.573,129.952 196.573,131.595 195.732,132.436 184.683,132.436 183.718,131.47 183.718,127.533 181.534,125.349 147.955,125.349 140.487,117.881 140.487,111.15 140.513,111.125 ; v3(201.981,121.539) 202.057,121.539 204.419,119.177 223.418,119.177 236.601,105.994 243.002,105.994 v1(246.177,102.819) 249.707,99.289 249.707,93.548 250.698,92.558 v1(250.698,90.17) ; 161.773,119.863 161.265,119.355 161.265,93.828 162.509,92.583 ; 161.773,119.863 161.773,117.856 162.509,117.119 162.509,92.583
  Bottom Layer w1.524: 170.358,115.011 170.256,115.011 169.062,113.817 169.062,88.824 ; 172.034,76.911 172.034,77.292 171.094,78.232 170.002,79.324 168.097,79.324 167.818,79.604 167.818,87.579 169.062,88.824 ; 189.154,117.119 188.341,116.307 177.698,116.307 175.819,114.427 171.78,114.427 170.409,113.055 170.409,90.17 169.062,88.824
  other v1: 255.753,99.314
  other v3: 169.088,115.697 191.948,120.117
+15V_HVISO_U1: C38_U1.1 C39_U1.1 C40_U1.1 D8_U1.1 P3_U1.4 U17_U1.8 | length 41.4
  Top Layer w1.27: C40_U1.1@98.273,71.399 98.273,67.488 C38_U1.1@97.688,66.904 97.688,67.767 95.072,67.767 95.072,72.619 94.971,72.72 P3_U1.4@93.294,72.72 92.837,72.72 90.907,74.651 90.907,78.969 91.694,79.756 94.285,79.756 96.215,77.826 105.715,77.826 106.451,77.089 U17_U1.8@106.451,75.082
+15V_HVISO_U2: C38_U2.1 C39_U2.1 C40_U2.1 D8_U2.1 P3_U2.4 U17_U2.8 | length 22
  Top Layer w1.27: C39_U2.1@172.872,78.461 172.872,81.077 173.076,81.28 173.076,82.55 174.777,82.55 175.59,83.363 175.59,88.468 176.962,89.84 179.578,89.84 182.651,92.913 P3_U2.4@183.591,92.913
AGND_U1: C1_U1.2 C2_U1.2 C3_U1.2 C4_U1.2 C12_U1.2 C14_U1.2 C33_U1.2 C46_U1.2 C53_U1.2 C55_U1.2 C56_U1.2 C57_U1.2 C58_U1.1 C59_U1.1 C60_U1.1 C62_U1.2 C63_U1.2 C64_U1.2 C65_U1.2 P4_U1.15 P4_U1.30 R9_U1.1 R10_U1.1 R11_U1.2 R12_U1.2 R14_U1.1 R71_U1.1 R72_U1.2 U1_U1.11 U2_U1.1 U4_U1.4 U5_U1.5 U7_U1.5 U8_U1.4 U10_U1.5 U12_U1.5 U13_U1.4 U14_U1.5 | length 622.8
  Top Layer w0.508: U7_U1.5@38.964,41.377 40.208,41.377 v1(40.234,41.402) ; v1(63.246,41.326) 63.271,41.351 U10_U1.5@64.262,41.351 66.294,41.351 C55_U1.2@66.472,41.529 ; U12_U1.5@80.874,41.25 v1@81.966,41.25
  Top Layer w0.762: U5_U1.5@76.225,60.909 v1(77.775,60.909) ; U8_U1.4@94.107,125.476 95.148,125.476 96.444,126.771 C46_U1.2@96.444,127.203 ; U13_U1.4@100.051,116.535 103.226,116.535 103.53,116.23 C64_U1.2@103.53,115.291
  Top Layer w1.016: R9_U1.1@1.676,65.913 R9_U1.1@1.676,66.04 v1(1.676,70.028) ; v1(3.81,58.217) 4.242,58.649 5.766,58.649 v1(5.893,58.776) 5.918,58.801 U1_U1.11@5.918,60.731 ; v1(17.755,105.232) 20.777,105.232 21.539,104.47 21.539,102.057 19.634,100.152 19.126,100.152 19.05,100.076 U14_U1.5@19.05,99.67 ; v1(78.232,122.123) R72_U1.2@78.765,122.123 ; C53_U1.2@83.515,128.651 v1(83.515,130.2) ; C46_U1.2@96.444,127.203 v1(97.472,127.203) C33_U1.2@98.501,127.203 98.501,129.413 98.806,129.718 C60_U1.1@100.711,129.718 ; U4_U1.4@100.508,121.615 101.93,121.615 v1(101.956,121.641) ; C58_U1.1@107.467,129.718 v1(109.017,129.718) 110.16,129.718 111.379,128.499 R14_U1.1@111.379,124.079 C14_U1.2@111.379,121.895 v1(111.379,120.167)
  Top Layer w1.27: C4_U1.2@1.575,46.609 v1(6.706,46.609) ; v1(5.309,70.46) 5.334,70.485 R12_U1.2@6.35,70.485 ; v1(5.359,74.168) 5.41,74.219 C62_U1.2@5.41,83.261 v1(5.41,84.836) ; U2_U1.1@11.379,48.92 C2_U1.2@13.716,48.92 ; v1(13.081,51.435) v1@13.106,51.41 ; C2_U1.2@13.106,49.225 v1@13.106,51.41 ; C2_U1.2@13.741,48.946 C2_U1.2@13.716,48.92 ; 14.808,48.946 14.808,51.486 ; C3_U1.2@16.104,48.92 C2_U1.2@13.716,48.92 ; R11_U1.2@17.043,53.619 R10_U1.1@14.808,53.619 14.808,51.486 ; v3(61.544,125.374) 66.142,125.374 v3@66.192,125.324 ; P4_U1.15@71.044,128.047 71.267,128.27 71.577,128.27 71.996,128.689 P4_U1.30@71.996,129.952 ; v5(92.913,110.16) 95.009,110.16 95.948,111.1 v5(95.948,112.751) ; v1(106.553,111.252) C65_U1.2@106.553,113.055 108.585,113.055 108.915,113.386 ; R71_U1.1@108.915,111.582 108.915,113.386 ; C59_U1.1@108.915,114.046 108.915,113.386 ; v1@13.106,51.41 13.183,51.486 14.808,51.486
  Mid-Layer 1 w0.508: 68.809,123.901 68.809,125.806 69.922,126.92 70.453,126.92
  Mid-Layer 1 w0.762: 70.453,126.92 70.786,126.92 71.044,127.178
  Mid-Layer 1 w1.016: 68.732,123.165 70.062,123.165 70.418,123.52 70.662,123.52 70.967,123.825 71.577,123.825
  Mid-Layer 1 w1.27: 66.573,123.19 66.192,123.571 v3(66.192,125.349) 67.208,125.349 67.462,125.095 ; 71.577,123.825 71.73,123.977 71.73,126.492 71.044,127.178 P4_U1.15@71.044,128.047 71.996,128.999 P4_U1.30@71.996,129.952 71.996,131.178 72.161,131.343
  Bottom Layer w0.508: v1@63.17,41.402 v1(63.246,41.326)
  Bottom Layer w0.762: v1(77.775,60.909) 77.775,60.96 78.486,61.671
  Bottom Layer w1.016: v1(1.676,70.028) 1.676,58.776 2.388,58.064 ; v1@3.683,58.217 3.531,58.064 2.388,58.064 ; v1(6.706,46.609) 6.553,46.457 2.743,46.457 2.388,46.812 2.388,58.064 ; 11.354,45.364 11.354,45.441 ; 11.76,39.319 11.76,38.176 12.421,37.516 ; 11.989,35.255 20.269,35.255 24.663,39.649 ; 12.116,37.516 14.326,35.306 ; 12.421,45.364 12.421,37.516 ; 13.081,35.306 12.421,35.966 12.421,37.516 ; 28.499,39.649 24.663,39.649 ; v1(40.234,41.402) 40.259,41.377 40.259,39.649 ; v1(63.246,41.326) 61.468,41.326 59.792,39.649 40.259,39.649 ; 24.663,39.649 40.259,39.649
  Bottom Layer w1.27: v1(1.676,70.028) 2.108,70.46 ; 2.032,70.46 2.108,70.46 ; 2.718,70.46 2.108,70.46 ; v1(6.706,46.609) 6.706,45.415 6.756,45.364 11.354,45.364 12.09,45.364 ; 12.421,45.364 12.09,45.364 ; v1(13.081,51.435) 13.081,46.355 12.09,45.364 ; v1(17.755,105.232) v1@17.755,105.385 ; P4_U1.15@71.171,128.047 71.996,128.872 P4_U1.30@71.996,129.952 ; 78.486,61.671 78.74,61.925 94.564,61.925 96.418,63.779 96.418,89.738 95.098,91.059 ; v1(81.89,41.224) 83.642,41.224 88.494,46.076 99.635,46.076 103.276,49.717 103.276,90.754 97.815,96.215 97.815,102.87 ; v5(92.913,110.16) 92.431,109.677 92.431,104.673 ; v5(95.948,112.751) 99.924,112.751 ; 97.866,112.751 99.924,110.693 ; v5(103.327,116.535) 103.327,112.776 ; v1(106.553,111.252) 106.553,112.039 105.842,112.751 103.353,112.751 ; 2.108,70.46 v1(5.309,70.46) 5.588,70.739 5.588,93.218 v1@17.755,105.385 ; v1@17.755,105.385 18.466,106.096 18.466,115.722 24.892,122.149 ; v1@17.755,105.385 17.755,116.764 23.139,122.149 24.892,122.149 ; 24.892,122.149 31.471,122.149 ; 31.471,122.149 57.226,122.149 ; 31.471,122.149 32.715,123.393 57.15,123.393 59.131,125.374 59.334,125.374 ; 57.226,122.149 57.582,122.149 ; 57.226,122.149 58.776,123.698 58.776,124.816 59.334,125.374 ; 57.582,122.149 58.877,122.149 61.544,124.816 v3(61.544,125.374) 60.808,125.374 ; 57.582,122.149 60.808,125.374 ; 59.334,125.374 60.808,125.374 ; 92.431,104.673 92.431,93.726 95.098,91.059 ; 92.431,104.673 91.288,103.53 91.288,93.218 93.447,91.059 95.098,91.059 ; 97.815,102.87 97.815,104.267 ; 97.815,102.87 99.212,104.267 ; 97.815,104.267 99.212,104.267 ; 97.815,104.267 99.924,106.375 99.924,110.693 ; 99.212,104.267 101.194,106.248 101.194,110.693 ; 99.924,110.693 99.924,112.751 ; 99.924,110.693 101.194,110.693 ; 99.924,112.751 101.194,112.751 ; 101.194,110.693 101.194,112.751 ; 101.194,110.693 101.244,110.693 103.302,112.751 ; 101.194,112.751 103.302,112.751 ; 103.302,112.751 103.353,112.751 ; 103.302,112.751 103.327,112.776 ; 103.327,112.776 103.353,112.751
AGND_U2: C1_U2.2 C2_U2.2 C3_U2.2 C4_U2.2 C12_U2.2 C14_U2.2 C33_U2.2 C46_U2.2 C53_U2.2 C55_U2.2 C56_U2.2 C57_U2.2 C58_U2.1 C59_U2.1 C60_U2.1 C62_U2.2 C63_U2.2 C64_U2.2 C65_U2.2 P4_U2.15 P4_U2.30 R9_U2.1 R10_U2.1 R11_U2.2 R12_U2.2 R14_U2.1 R71_U2.1 R72_U2.2 U1_U2.11 U2_U2.1 U4_U2.4 U5_U2.5 U7_U2.5 U8_U2.4 U10_U2.5 U12_U2.5 U13_U2.4 U14_U2.5 | length 784.1
  Top Layer w0.762: 162.865,118.821 162.979,118.935 162.979,119.926 ; v1@163.246,119.659 162.979,119.926 ; C33_U2.2@164.135,124.689 163.551,124.104 163.551,123.698 162.979,123.126 162.979,119.926 ; U5_U2.5@170.891,56.617 172.009,56.617 v1(172.034,56.642) ; v1@172.745,121.945 172.745,122.733 173.152,123.139 C63_U2.2@173.152,124.587 174.549,124.587 175.666,125.705 v5(175.666,127.33) ; U7_U2.5@196.901,40.284 v1(198.984,40.284) 200.101,41.402 C55_U2.2@200.939,41.402 202.311,42.774 C58_U2.1@203.276,42.774 ; C65_U2.2@197.942,125.07 v5@200.228,125.07 ; v5(200.304,125.679) 200.304,125.146 v5@200.228,125.07 ; C62_U2.2@200.355,124.028 200.355,124.943 v5@200.228,125.07 ; U10_U2.5@221.615,40.208 223.266,40.208 224.536,41.478 v1(225.628,41.478) ; U12_U2.5@238.912,40.208 v1@241.351,40.208 ; v1(241.351,40.31) 242.951,40.31 C56_U2.2@243.027,40.386 243.586,40.945 C60_U2.1@245.339,40.945 ; C57_U2.2@245.643,107.696 245.643,108.204 245.974,108.534 250.19,108.534 ; v1(250.952,108.534) 250.19,108.534 ; v1(251.104,94.92) 251.663,94.92 R72_U2.2@251.689,94.945 ; C64_U2.2@252.679,106.807 252.476,107.01 C59_U2.1@250.52,107.01 250.546,107.036 250.546,108.179 250.19,108.534 ; U13_U2.4@252.755,103.759 U13_U2.4@252.755,103.962 v1(252.755,105.639) C64_U2.2@252.755,106.756 ; v1(255.549,87.808) U14_U2.5@255.549,89.205
  Top Layer w1.016: R11_U2.2@138.709,100.432 138.709,102.514 R10_U2.1@138.735,102.54 ; v1(145.009,110.973) U1_U2.11@146.431,110.973 ; U4_U2.4@160.147,118.821 162.865,118.821 ; 162.979,118.935 v1(163.474,119.431) v1@163.246,119.659 ; C33_U2.2@164.135,124.689 C33_U2.2@164.313,124.689 ; v1@171.094,116.815 C14_U2.2@171.094,117.856 ; R14_U2.1@171.247,122.453 172.237,122.453 v1@172.745,121.945 ; C46_U2.2@176.759,119.177 176.835,119.101 U8_U2.4@178.918,119.101 v1(180.124,119.101) ; v1(182.88,119.075) 182.88,119.05 182.956,118.974 C53_U2.2@182.956,116.992 ; 188.163,126.848 188.001,127.01 P4_U2.30@188.001,128.047 188.001,129 P4_U2.15@188.953,129.952
  Top Layer w1.27: C1_U2.2@131.013,113.792 131.013,116.891 132.41,118.288 v3(134.645,118.288) 137.668,118.288 ; C3_U2.2@134.391,101.473 134.391,102.413 ; 134.595,106.02 134.391,105.816 134.391,102.413 ; R12_U2.2@137.719,116.561 137.719,118.237 137.668,118.288 ; R10_U2.1@138.709,102.514 138.608,102.413 134.391,102.413 ; 139.852,118.288 137.668,118.288 ; C12_U2.2@140.208,119.329 140.208,117.17 R9_U2.1@140.259,117.119 ; v5(164.109,127.203) 164.135,127.178 C33_U2.2@164.135,124.689
  Mid-Layer 1 w1.016: 188.036,126.771 188.001,126.807 P4_U2.30@188.001,128.047 188.001,129 P4_U2.15@188.953,129.952 188.953,131.468 188.925,131.496
  Bottom Layer w0.762: v1(172.034,56.642) 174.574,56.642 ; 174.879,47.498 174.879,46.787 ; 175.158,47.219 175.158,55.093 174.879,55.372 ; 175.666,58.09 174.879,57.302 174.879,56.896 ; 175.946,58.915 174.574,57.544 174.574,56.642 ; 240.868,39.827 240.386,40.31 ; 241.808,39.827 241.808,39.853 v1(241.351,40.31) ; 245.593,39.827 255.575,49.809 255.575,60.782 256.591,61.798 256.591,69.901 256.591,70.485 256.159,70.917 ; 174.574,56.642 174.574,47.092 174.879,46.787 ; 174.879,46.787 180.721,40.945 ; 174.879,55.372 174.879,56.642 ; 174.879,55.372 175.692,56.185 ; 174.879,56.642 174.879,56.896 ; 174.879,56.642 175.692,56.642 ; 174.879,56.896 175.692,57.709 175.692,56.642 ; 175.692,56.185 175.692,46.685 175.946,46.431 181.407,40.97 ; 175.692,56.185 175.692,56.642 ; 180.721,40.945 181.381,40.284 181.432,40.284 ; 180.721,40.945 181.432,40.945 ; 181.407,40.97 181.432,40.945 ; 181.407,40.97 193.142,40.97 ; 181.432,40.284 182.093,40.284 ; 181.432,40.284 181.432,40.945 ; 181.432,40.284 181.432,40.259 182.169,39.522 198.222,39.522 v1(198.984,40.284) ; 181.432,40.945 193.116,40.945 193.142,40.97 ; 181.432,40.945 182.093,40.284 ; 182.093,40.284 v1(198.984,40.284) ; 193.142,40.97 198.882,40.97 198.984,40.869 v1(198.984,40.284) ; 240.386,40.31 240.335,40.361 241.3,40.361 v1(241.351,40.31) ; 240.386,40.31 v1(241.351,40.31) ; 240.386,40.31 238.531,40.31 238.049,40.792 230.937,40.792 226.314,40.792 v1(225.628,41.478) 238.176,41.478 238.836,40.818 240.843,40.818 241.275,40.386 244.881,40.386 ; 244.881,40.386 245.466,40.386 ; 244.881,40.386 244.881,40.411 245.466,40.996 ; 244.881,40.386 244.881,39.827 245.364,39.827 245.466,39.929 245.466,40.386 ; 245.466,40.386 245.466,40.996 ; 245.466,40.386 255.041,49.962 255.041,61.138 ; 245.466,40.996 254.635,50.165 254.635,60.731 255.041,61.138 ; 255.041,61.138 256.159,62.255 256.159,70.917 ; 255.549,75.006 255.549,71.526 256.159,70.917 ; 255.549,75.006 256.159,74.397 ; 255.549,75.006 v1(255.549,87.808) 256.159,87.198 256.159,74.397 ; 256.159,70.917 256.159,74.397
  Bottom Layer w1.016: 175.666,58.09 175.806,58.229 175.806,56.756 175.692,56.642 ; 175.946,46.431 175.946,58.915 175.946,69.571 168.86,76.657 166.929,76.657 165.125,78.461 165.125,115.976 167.869,118.72 171.882,118.72 172.263,119.101 v1(180.124,119.101) 182.855,119.101 v1(182.88,119.075) ; P4_U2.30@187.909,127.955 187.909,126.289 188.468,125.73 203.454,125.73 ; P4_U2.30@187.909,127.955 187.874,127.92 187.232,127.92 187.452,128.14 187.452,129.794 188.062,130.404 188.501,130.404 P4_U2.15@188.953,129.952 188.953,129.644 188.001,128.692 P4_U2.30@188.001,128.047 P4_U2.30@187.909,127.955 ; 203.454,125.73 204.8,125.73 ; 203.454,125.73 206.273,122.911 225.374,122.911 ; 204.8,125.73 206.172,125.73 207.137,124.765 214.401,124.765 214.427,124.79 224.892,124.79 225.831,123.85 ; 204.8,125.73 206.68,123.85 225.831,123.85 ; 225.374,122.911 235.966,112.319 ; 225.374,122.911 226.771,122.911 ; 225.831,123.85 226.771,122.911 ; 226.771,122.911 235.966,113.716 235.966,113.284 ; 235.966,112.319 235.966,113.284 ; 235.966,112.319 237.515,110.769 ; 235.966,113.284 238.481,110.769 ; 237.515,110.769 238.481,110.769 ; 237.515,110.769 238.176,110.109 246.786,110.109 ; 238.481,110.769 247.244,110.769 ; 246.786,110.109 247.904,110.109 ; 246.786,110.109 251.257,105.639 v1@252.374,105.639 ; 247.244,110.769 248.615,110.769 249.276,110.109 ; 247.244,110.769 247.904,110.109 ; 247.904,110.109 249.276,110.109 ; 247.904,110.109 v1@252.374,105.639 ; 249.276,110.109 252.755,106.629 v1(252.755,105.639) v1@252.374,105.639
  Bottom Layer w1.27: v3(136.347,102.464) 132.944,102.464 130.099,105.308 130.099,113.563 131.039,114.503 133.985,114.503 134.696,115.214 134.696,119.05 137.185,119.05 145.339,127.203 v5(164.109,127.203) ; 230.937,40.792 231.902,39.827 240.868,39.827 241.808,39.827 244.881,39.827 ; 245.364,39.827 245.593,39.827 247.015,39.827 256.515,49.327 256.515,60.579 257.404,61.468 257.404,69.088 256.591,69.901
  other v1: 171.12,116.713 172.796,119.151 172.771,121.971
EN_HVWRK_U1: D13_U1.1 Q1_U1.1 R15_U1.2 R40_U1.2 | length 18.6
  Top Layer w0.762: R15_U1.2@90.805,59.004 90.805,58.826 91.592,58.039 96.088,58.039 ; Q1_U1.1@96.012,53.518 96.012,57.963 96.088,58.039 ; D13_U1.1@99.593,59.766 101.702,59.766 R40_U1.2@101.879,59.944 ; 100.686,59.944 99.492,59.944 99.492,59.106 98.425,58.039 96.088,58.039
EN_HVWRK_U2: D13_U2.1 Q1_U2.1 R15_U2.2 R40_U2.2 | length 22.6
  Top Layer w0.508: Q1_U2.1@152.603,70.256 153.035,70.688 153.035,73.228 154.381,74.574 R15_U2.2@167.742,74.574 ; R15_U2.2@167.742,74.143 D13_U2.1@167.742,76.251 ; D13_U2.1@167.792,76.378 R40_U2.2@167.792,78.461
EN_WRK_U1: P4_U1.6 R38_U1.1 R55_U1.2 | length 88.5
  Top Layer w0.381: P4_U1.6@53.899,128.047 53.899,116.433 54.483,115.849 62.738,115.849 64.287,114.3 82.474,114.3 R55_U1.2@84.15,112.624 ; R55_U1.2@83.922,112.395 R55_U1.2@84.15,112.624 ; R38_U1.1@103.911,91.135 106.553,91.135 v1(106.604,91.186) ; v1@105.639,104.546 99.746,104.546 98.692,105.6 95.842,105.6 95.83,105.588 93.426,105.588 93.413,105.6 92.413,105.6 92.401,105.588 92.126,105.588 89.51,108.204 89.51,111.963 88.646,112.827 84.353,112.827 R55_U1.2@84.15,112.624
  Bottom Layer w0.381: v1(105.664,104.572) 105.664,104.496 107.798,102.362 107.798,92.38 v1(106.604,91.186)
EN_WRK_U2: P4_U2.6 R38_U2.1 R55_U2.2 | length 71.2
  Top Layer w0.381: v1(178.054,113.081) 187.706,113.081 188.747,114.122 204.495,114.122 206.098,115.725 P4_U2.6@206.098,129.952 ; v1(215.798,116.154) 216.56,116.154 217.881,117.475 R55_U2.2@217.881,117.653
  Top Layer w0.762: v1@175.133,100.152 175.158,100.127 R38_U2.1@175.158,98.933
  Bottom Layer w0.381: v1(206.07,115.697) 206.553,116.18 v1@215.468,116.18
  Bottom Layer w0.762: v1(175.158,100.152) 175.158,110.134 v1@178.079,113.055 ; v1(178.054,113.081) v1@178.054,113.157
ENWRK_U1: Q6_U1.3 R51_U1.1 U6_U1.13 U9_U1.13 U11_U1.13 | length 76.7
  Top Layer w0.508: v1@83.773,103.908 84.539,104.673 85.369,104.673 86.335,105.639 87.046,105.639
  Top Layer w0.762: 87.046,105.639 87.046,105.969 87.96,106.883 87.96,110.49 Q6_U1.3@88.24,110.769
  Top Layer w1.016: U6_U1.13@30.582,108.592 30.607,108.567 v1(30.607,103.784) ; v1@51.562,104.082 U9_U1.13@51.562,108.585 ; U11_U1.13@71.298,108.618 71.298,104.115 v1@71.323,104.089
  Bottom Layer w0.762: v1@71.323,104.013 v1@83.668,104.013
  Bottom Layer w1.016: v1(30.607,103.784) 30.886,104.064 71.272,104.064 v1@71.323,104.013
  other v1: 83.718,103.962 51.587,104.089 71.298,104.089
ENWRK_U2: Q6_U2.3 R51_U2.1 U6_U2.13 U9_U2.13 U11_U2.13 | length 59.9
  Top Layer w0.508: U6_U2.13@191.465,106.967 191.465,103.759 v1(191.516,103.708)
  Top Layer w0.762: v1@211.074,104.902 U9_U2.13@211.074,106.451 ; Q6_U2.3@221.742,113.487 v1(222.656,113.487) 223.723,113.487 R51_U2.1@223.749,113.462 ; v1(223.977,107.925) 224.968,107.925 226.416,106.477 v1(226.416,104.877) ; v1(231.318,105.308) U11_U2.13@231.318,107.145
  Bottom Layer w0.762: v1(191.516,103.708) 203.251,103.708 204.419,104.877 v1(226.416,104.877) 230.886,104.877 v1(231.318,105.308) ; v1(222.656,113.487) 222.656,109.245 v1(223.977,107.925)
  other v1: 211.099,104.902
FAULT_U1: P4_U1.21 U16_U1.6 | length 12
  Top Layer w0.381: P4_U1.21@54.851,129.952 54.852,120.434 55.702,119.583 U16_U1.6@56.972,119.583
FAULT_U2: P4_U2.21 U16_U2.6 | length 10
  Top Layer w0.381: U16_U2.6@203.962,119.05 204.908,119.05 205.136,119.278 205.146,119.278 P4_U2.21@205.146,128.047
GND_HVISO_U1: C38_U1.2 C39_U1.2 C40_U1.2 P3_U1.3 R18_U1.2 R34_U1.2 R46_U1.1 U17_U1.5 | length 37.6
  Top Layer w0.762: R18_U1.2@90.805,61.392 91.389,61.392 92.964,59.817 R34_U1.2@93.726,59.817 ; R34_U1.2@93.751,59.792 R34_U1.2@93.726,59.817 ; R34_U1.2@94.082,59.792 96.317,59.792 ; 95.479,59.919 95.402,59.842 ; R46_U1.1@97.282,59.868 97.257,59.842 95.402,59.842 ; C38_U1.2@101.117,66.904 101.117,65.557 100.533,64.973 97.307,64.973 95.555,63.221 95.555,60.274 95.123,59.842 95.402,59.842 ; R34_U1.2@93.726,59.817 95.377,59.817 95.402,59.842
  Top Layer w1.27: P3_U1.3@93.294,77.8 93.294,76.86 95.072,75.082 U17_U1.5@98.831,75.082 98.831,73.838 101.117,71.552 C38_U1.2@101.117,66.904